# Altium PCB PCB1.PcbDoc
Units mil, origin at the board's own origin, x right, y up, seen from the top; angles counter-clockwise.
Board outline 3543.31 x 4479.86 mil, 2 copper layers (Top Layer, Bottom Layer); 70 components, 150 nets, 536 pads, 21 vias.
Unrouted connection lines stored in the file: 8.
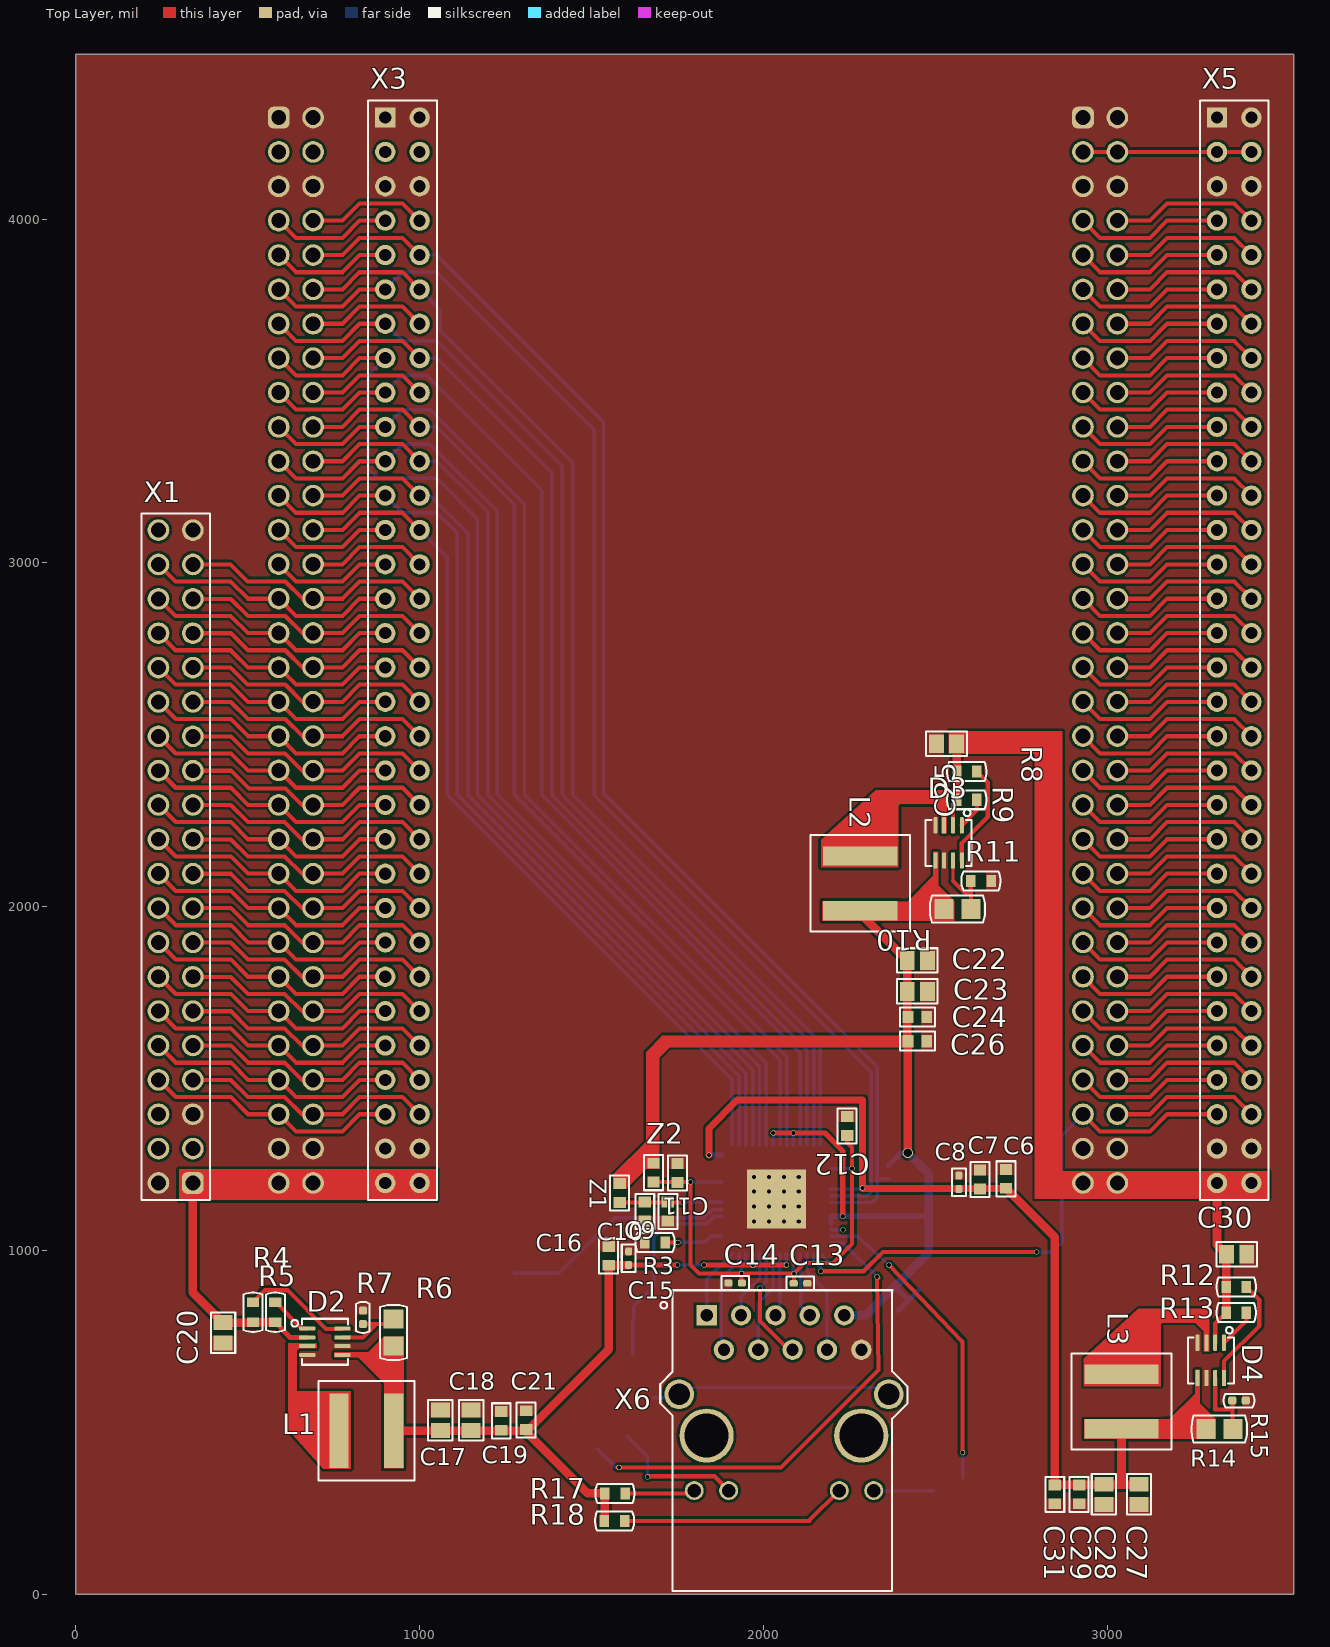
[diagram p0: Top Layer view]
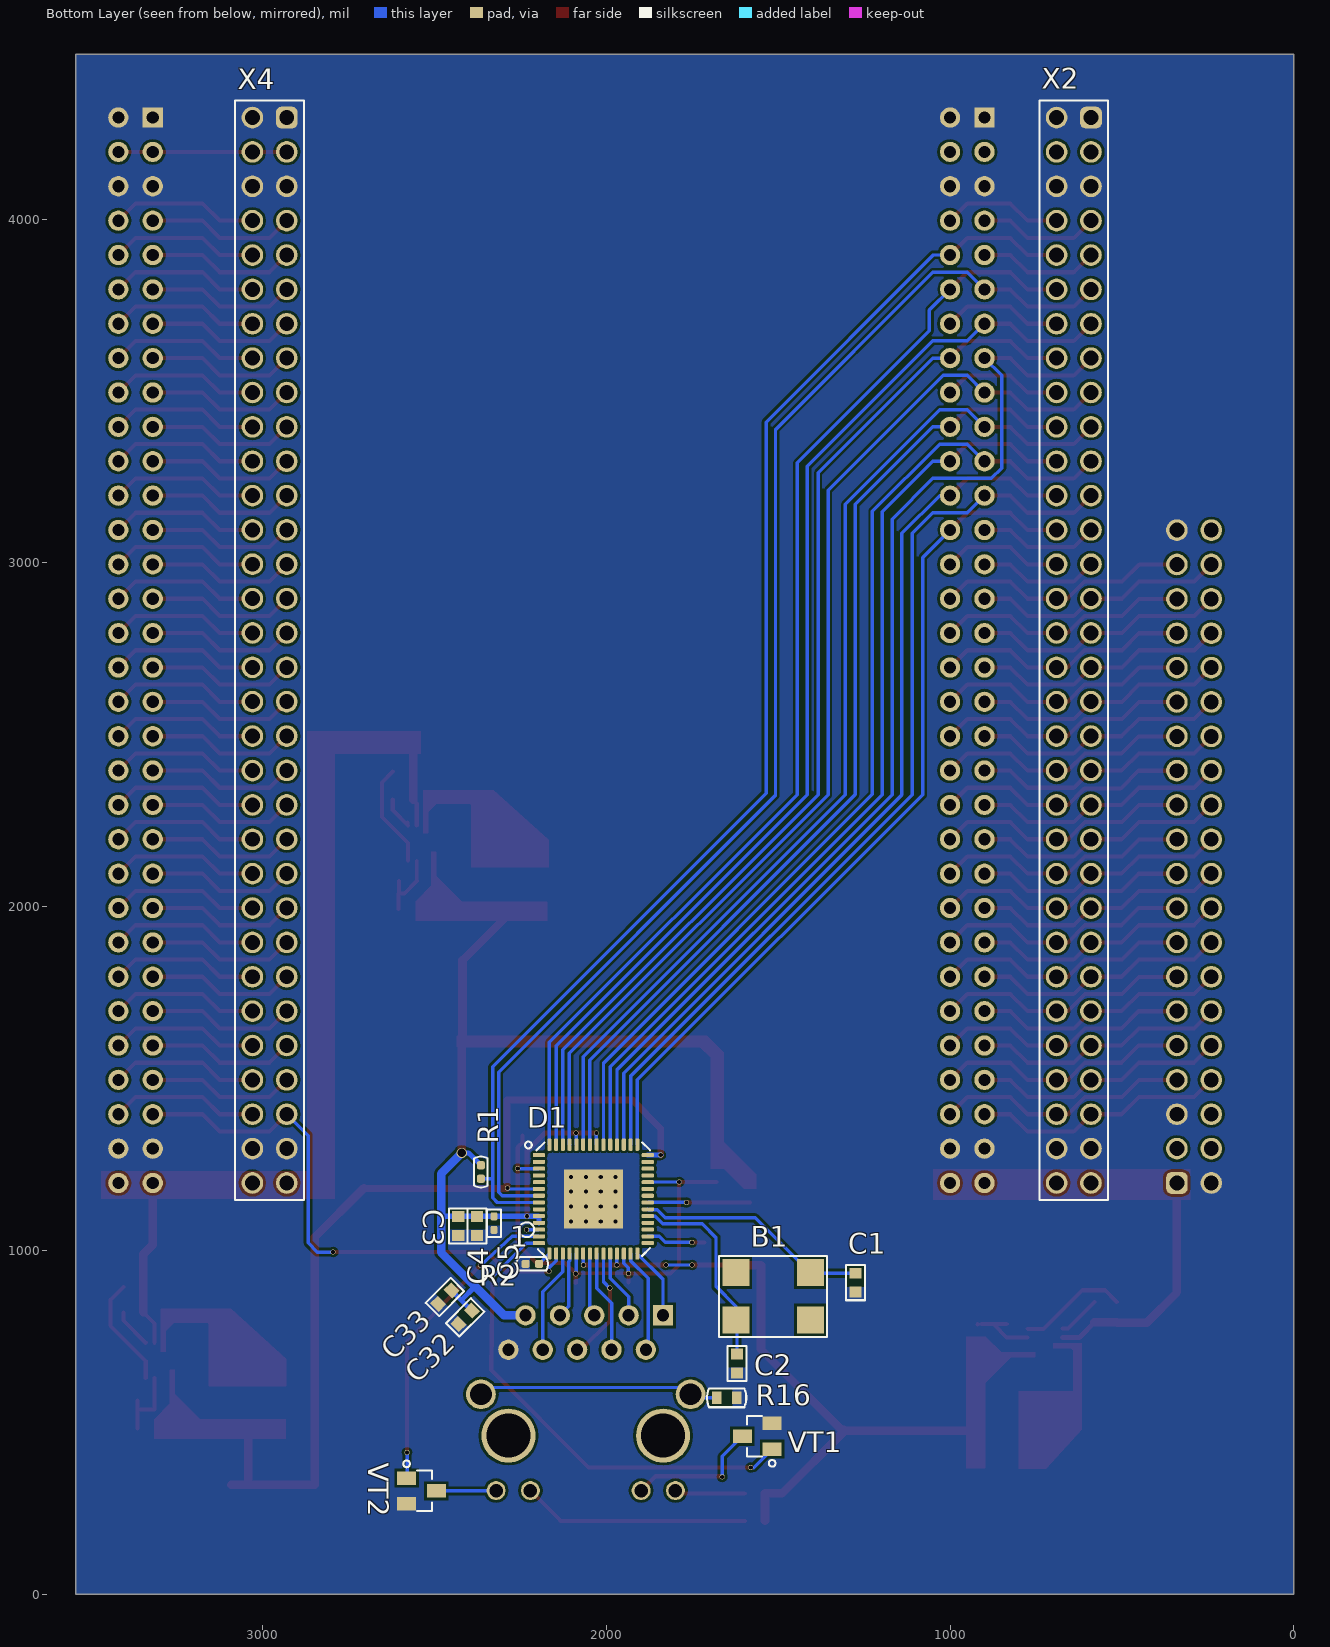
[diagram p1: Bottom Layer view, seen from below]

## Layer stack, top to bottom
Top Solder: solder mask 0.4, Solder Resist, Dk 3.5
Top Layer: signal copper 1.4
Dielectric 1: dielectric 12.6, FR-4, Dk 4.8
Bottom Layer: signal copper 1.4
Bottom Solder: solder mask 0.4, Solder Resist, Dk 3.5

## Board outline
0,0 3543.31,0 3543.31,4479.86 0,4479.86

## Design rules (kind name [scope] priority, off if disabled: settings)
Clearance [All] p1: gap=7.5 ignorepadtopadclearanceinfootprint=FALSE
PlaneConnect [All] p1: planeconnectstyle=Direct reliefexpansion=20 reliefentries=4 reliefconductorwidth=10 reliefairgap=10
PolygonConnect [All] p1: connectstyle=Direct reliefconductorwidth=10 reliefentries=4 polygonreliefangle="90 Angle" airgapwidth=10
RoutingVias [All] p1: holewidth=27 width=30 viastyle="Through Hole" minholewidth=27 minwidth=30 maxholewidth=27 maxwidth=30
SolderMaskExpansion [All] p1: expansion=4
Width [All] p1: maxlimit=10 minlimit=15 preferedwidth=10 toplayer_minwidth=25 minimp=50.000000 maximp=50.000000 favimp=50.000000
29 further rules are at their usual default settings.

## Components (designator, comment, footprint, x,y, rotation, side; value= is the part's Value field where it differs from the comment)
1 "TP_1" TP0.3 2232,1060 r90 bottom
B1 "РК540-5ДП-25000К-П18" DFN580P700X120-4N 1515,866 r180 bottom
C1 "18" CAPC1608L 1275,906 r90 bottom
C2 "18" CAPC1608L 1620,671 r90 bottom
C3 "4,7 мк" CAPC1608L 2431,1071 r90 bottom
C4 "1 мк" CAPC1608L 2376,1071 r270 bottom
C5 "0,1 мк" CAPC1005L 2327,1079 r270 bottom
C6 "4,7 мк" CAPC1608L 2706,1208 r270 top
C7 "1 мк" CAPC1608L 2630,1206 r90 top
C8 "0,1 мк" CAPC1005L 2569,1198 r90 top
C9 "10 мк" CAPC1608L 1722,1113 r90 top
C10 "4,7 мк" CAPC1608L 1655,1113 r90 top
C11 "4,7 мк" CAPC1608L 1750,1225 r270 top
C12 "1 мк" CAPC1608L 2244,1362 r90 top
C13 "0,1 мк" CAPC1005L 2108,904 r0 top
C14 "0,1 мк" CAPC1005L 1918,905 r180 top
C15 "1 мк" CAPC1608L 1550,984 r90 top
C16 "0,1 мк" CAPC1005L 1608,977 r90 top
C17 "22 мк" CAPC2012L 1060,505.47 r90 top
C18 "22 мк" CAPC2012L 1150,505.47 r90 top
C19 "0,1 мк" CAPC1608L 1237.43,503.94 r90 top
C20 "22 мк" CAPC2012L 428,760 r90 top
C21 "0,1 мк" CAPC1608L 1310,505.94 r90 top
C22 "22 мк" CAPC2012L 2448.13,1843.53 r0 top
C23 "22 мк" CAPC2012L 2448.13,1753.53 r0 top
C24 "0,1 мк" CAPC1608L 2448.13,1678.53 r0 top
C25 "22 мк" CAPC2012L 2533,2474 r0 top
C26 "0,1 мк" CAPC1608L 2448.13,1608.53 r0 top
C27 "22 мк" CAPC2012L 3093,290 r270 top
C28 "22 мк" CAPC2012L 2991,290 r270 top
C29 "0,1 мк" CAPC1608L 2919,290 r270 top
C30 "22 мк" CAPC2012L 3377,988.54 r180 top
C31 "0,1 мк" CAPC1608L 2848,290 r270 top
C32 "0,1 мк" CAPC1608L 2411,805 r315 bottom
C33 "1000" CAPC1608L 2470,864 r315 bottom
D1 "88E1512-A0-NNP2I000*" QFN50P800X800X100_HS-57N 2038,1149 r180 bottom
D2 "MP2143" MP2143 724,734 r270 top
D3 "MP2143" MP2143 2539,2185.53 r180 top
D4 "MP2143" MP2143 3302,680 r180 top
L1 "1 мк" INDC6466X32N 845,475 r0 top
L2 "1 мк" INDC6466X32N 2282,2068 r270 top
L3 "1 мк" INDC6466X32N 3042,560 r270 top
R1 "4,7 к" RESC1005L 2365,1228 r270 bottom
R2 "0" RESC1005L 2215.35,960.51 r180 bottom
R3 "4,99 к" RESC1608L 1685,1023 r180 top
R4 "100 к" RESC1608L 515,820 r270 top
R5 "100 к" RESC1608L 580,820 r270 top
R6 "200 к" RESC2012X90 924,761 r270 top
R7 "44,2 к" RESC1005L 835,805 r270 top
R8 "100 к" RESC1608L 2592,2393 r180 top
R9 "100 к" RESC1608L 2592,2311 r180 top
R10 "200 к" RESC2012X90 2565,1993 r180 top
R11 "100 к" RESC1608L 2633,2075 r180 top
R12 "100 к" RESC1608L 3376,893.54 r180 top
R13 "100 к" RESC1608L 3376,818.54 r180 top
R14 "200 к" RESC2012X90 3327,480 r180 top
R15 "300 к" RESC1005L 3384,563 r180 top
R16 "0" RESC1608L 1650,571 r180 bottom
R17 "750" RESC1608L 1568,292.7 r180 top
R18 "750" RESC1608L 1567,212.7 r180 top
VT1 "NDS331N" SOT95P251X112-3N 1561,459 r0 bottom
VT2 "NDS331N" SOT95P251X112-3N 2538,300 r180 bottom
X1 "PLD40" PLD-40 290,1746 r90 top
X2 "PLD64" PLD-64chin 640,3746 r270 bottom
X3 "pbd-64" PBD-64chain 950,4046 r0 top
X4 "PLD64" PLD-64chin 2980,3746 r270 bottom
X5 "pbd-64" PBD-64chain 3370,4046 r0 top
X6 "HFJ11-1G01E-L12RL" HALO_HFJ11-1G01E 2060,556 r0 top
Z1 "BLM18PG471SN1" INDC1608L 1582,1167 r270 top
Z2 "BLM18PG471SN1" INDC1608L 1680,1226 r270 top

## Footprints (in the part's own frame and the unit in brackets; to place one, negate y for a bottom-side part, rotate by r counter-clockwise, add the part's x,y. Pads: shape width x height; smd on the part's side, far side on the other; paste and mask are expansions set on the pad)
CAPC1005L [mm] "Chip Capacitor, Body 1.0x0.5mm, IPC High Density"
  rrect50% 0.6x0.5 smd: 1(-0.5,0) 2(0.5,0)
  Top Layer pour cut-out: -0.2,0.5 -0.2,-0.5 0.2,-0.5 0.2,0.5
  silkscreen extent -1.02,-0.51 1.02,0.51, body extent -0.55,-0.3 0.55,0.3, height 0.6
CAPC1608L [mm] "Chip Capacitor, Body 1.6x0.8mm, IPC High Density"
  rect 0.8x0.9 smd: 1(-0.7,0) 2(0.7,0)
  Top Layer pour cut-out: -0.3,0.7 -0.3,-0.7 0.3,-0.7 0.3,0.7
  silkscreen extent -1.3,-0.7 1.3,0.7, body extent -0.87,-0.48 0.87,0.48, height 0.85
CAPC2012L [mm] "Chip Capacitor, Body 2.0x1.3mm, IPC High Density"
  rect 1.1x1.4 smd: 1(-0.75,0) 2(0.75,0)
  Top Layer pour cut-out: -0.2,0.9 -0.2,-0.9 0.2,-0.9 0.2,0.9
  silkscreen extent -1.5,-0.9 1.5,0.9, body extent -1.1,-0.72 1.1,0.73, height 1.1
DFN580P700X120-4N [mm] "DFN, 4-Leads, Body 5,00x7,00mm, Pitch 5,80mm, IPC Medium Density"
  rect 2x2 smd paste-0.1: 1(-2.75,-1.75) 2(2.75,-1.75) 3(2.75,1.75) 4(-2.75,1.75)
  silkscreen extent -4,-3 4,3, body extent -3.5,-2.5 3.5,2.5, height 1.21
HALO_HFJ11-1G01E [mm] "1x1 Tab-Down Gigabit Short Body RJ45"
  rect 1.5x1.5 hole 0.9: 1(-5.71,6.475)
  round 1.5 hole 0.9: 2(-4.44,3.935) 3(-3.17,6.475) 4(-1.9,3.935) 5(-0.63,6.475) 6(0.64,3.935) 7(1.91,6.475) 8(3.18,3.935) 9(4.45,6.475) 10(5.72,3.935)
  round 1.4 hole 1: 11(-6.63,-6.475) 12(-4.09,-6.475) 13(4.09,-6.475) 14(6.63,-6.475)
  round 2.2 hole 1.6: 15(7.745,0.635) 16(-7.745,0.635)
  round 4 hole 3.25: 17(5.715,-2.415) 18(-5.715,-2.415)
  silkscreen extent -9.14,-13.91 9.14,8.33, body extent -9.5,-13.84 9.5,8.25, height 14.97
INDC1608L [mm] "Chip Inductor, Body 1.6x0.8mm, IPC High Density"
  rect 0.8x0.9 smd: 1(-0.7,0) 2(0.7,0)
  Top Layer pour cut-out: -0.3,0.7 -0.3,-0.7 0.3,-0.7 0.3,0.7
  silkscreen extent -1.3,-0.7 1.3,0.7, body extent -0.88,-0.48 0.87,0.48, height 0.71
INDC6466X32N [mm] "Chip Inductor, 2-Leads, Body 6,36x6,56mm, IPC Medium Density"
  rect 1.43x5.5 smd paste-0.1: 1(-2.02,0) 2(2.02,0)
  silkscreen extent -3.56,-3.68 3.56,3.68, body extent -3.18,-3.28 3.18,3.28, height 3.21
MP2143 [mm]
  rrect50% 0.3x1.2 smd mask+0.04: 1(-0.975,-1.3) 2(-0.325,-1.3) 3(0.325,-1.3) 4(0.975,-1.3) 5(0.975,1.3) 6(0.325,1.3) 7(-0.325,1.3) 8(-0.975,1.3)
  silkscreen extent -1.7,-2.48 1.7,1.7, body extent -1.5,-1.52 1.5,1.52, height 0.81
PBD-64chain [mm] "Штырьевой соединитель шаг 2.54mm , 64 в 2 ряда"
  rect 1.5x1.5 hole 0.9: 1(-1.27,6.35)
  round 1.5 hole 0.9: 2(1.27,6.35) 3(-1.27,3.81) 4(1.27,3.81) 5(-1.27,1.27) 6(1.27,1.27) 7(-1.27,-1.27) 8(1.27,-1.27) 9(-1.27,-3.81) 10(1.27,-3.81) 11(-1.27,-6.35) 12(1.27,-6.35) 13(-1.27,-8.89) 14(1.27,-8.89) 15(-1.27,-11.43) 16(1.27,-11.43) 17(-1.27,-13.97) 18(1.27,-13.97) 19(-1.27,-16.51) 20(1.27,-16.51) 21(-1.27,-19.05) 22(1.27,-19.05) 23(-1.27,-21.59) 24(1.27,-21.59) 25(-1.27,-24.13) 26(1.27,-24.13) 27(-1.27,-26.67) 28(1.27,-26.67) 29(-1.27,-29.21) 30(1.27,-29.21) 31(-1.27,-31.75) 32(1.27,-31.75) 33(-1.27,-34.29) 34(1.27,-34.29) 35(-1.27,-36.83) 36(1.27,-36.83) 37(-1.27,-39.37) 38(1.27,-39.37) 39(-1.27,-41.91) 40(1.27,-41.91) 41(-1.27,-44.45) 42(1.27,-44.45) 43(-1.27,-46.99) 44(1.27,-46.99) 45(-1.27,-49.53) 46(1.27,-49.53) 47(-1.27,-52.07) 48(1.27,-52.07) 49(-1.27,-54.61) 50(1.27,-54.61) 51(-1.27,-57.15) 52(1.27,-57.15) 53(-1.27,-59.69) 54(1.27,-59.69) 55(-1.27,-62.23) 56(1.27,-62.23) 57(-1.27,-64.77) 58(1.27,-64.77) 59(-1.27,-67.31) 60(1.27,-67.31) 61(-1.27,-69.85) 62(1.27,-69.85) 63(-1.27,-72.39) 64(1.27,-72.39)
  silkscreen extent -2.54,-73.66 2.54,7.62, body extent -2.54,-73.66 2.54,7.62, height 8.51
PLD-40 [mm]
  rrect50% 1.6x1.6 hole 1.1: 1(-13.97,-1.27)
  round 1.6 hole 1.1: 2(-13.97,1.27) 3(-11.43,-1.27) 4(-11.43,1.27) 5(-8.89,-1.27) 6(-8.89,1.27) 7(-6.35,-1.27) 8(-6.35,1.27) 9(-3.81,-1.27) 10(-3.81,1.27) 11(-1.27,-1.27) 12(-1.27,1.27) 13(1.27,-1.27) 14(1.27,1.27) 15(3.81,-1.27) 16(3.81,1.27) 17(6.35,-1.27) 18(6.35,1.27) 19(8.89,-1.27) 20(8.89,1.27) 21(11.43,-1.27) 22(11.43,1.27) 23(13.97,-1.27) 24(13.97,1.27) 25(16.5,-1.27) 26(16.5,1.27) 27(19.04,-1.27) 28(19.04,1.27) 29(21.58,-1.27) 30(21.58,1.27) 31(24.12,-1.27) 32(24.12,1.27) 33(26.66,-1.27) 34(26.66,1.27) 35(29.2,-1.27) 36(29.2,1.27) 37(31.74,-1.27) 38(31.74,1.27) 39(34.28,-1.27) 40(34.28,1.27)
  silkscreen extent -15.24,-2.54 35.5,2.54, body extent -15.24,-2.56 35.52,2.54, height 8.5
PLD-64chin [mm]
  rrect50% 1.6x1.6 hole 1.1: 1(-13.97,1.27)
  round 1.6 hole 1.1: 2(-13.97,-1.27) 3(-11.43,1.27) 4(-11.43,-1.27) 5(-8.89,1.27) 6(-8.89,-1.27) 7(-6.35,1.27) 8(-6.35,-1.27) 9(-3.81,1.27) 10(-3.81,-1.27) 11(-1.27,1.27) 12(-1.27,-1.27) 13(1.27,1.27) 14(1.27,-1.27) 15(3.81,1.27) 16(3.81,-1.27) 17(6.35,1.27) 18(6.35,-1.27) 19(8.89,1.27) 20(8.89,-1.27) 21(11.43,1.27) 22(11.43,-1.27) 23(13.97,1.27) 24(13.97,-1.27) 25(16.5,1.27) 26(16.5,-1.27) 27(19.04,1.27) 28(19.04,-1.27) 29(21.58,1.27) 30(21.58,-1.27) 31(24.12,1.27) 32(24.12,-1.27) 33(26.66,1.27) 34(26.66,-1.27) 35(29.2,1.27) 36(29.2,-1.27) 37(31.74,1.27) 38(31.74,-1.27) 39(34.28,1.27) 40(34.29,-1.27) 41(36.83,1.27) 42(36.83,-1.27) 43(39.37,1.27) 44(39.37,-1.27) 45(41.91,1.27) 46(41.91,-1.27) 47(44.45,1.27) 48(44.45,-1.27) 49(46.99,1.27) 50(46.99,-1.27) 51(49.53,1.27) 52(49.53,-1.27) 53(52.07,1.27) 54(52.07,-1.27) 55(54.61,1.27) 56(54.61,-1.27) 57(57.15,1.27) 58(57.15,-1.27) 59(59.69,1.27) 60(59.69,-1.27) 61(62.23,1.27) 62(62.23,-1.27) 63(64.77,1.27) 64(64.77,-1.27)
  silkscreen extent -15.24,-2.54 66.04,2.54, body extent -15.24,-2.56 66.04,2.54, height 8.5
QFN50P800X800X100_HS-57N [mm] "QFN, 56-Leads, Body 8,00x8,00mm, Pitch 0,50mm, Thermal Pad 4,37x4,37mm, IPC Medium Density"
  rrect50% 0.9x0.3 smd mask+0.04: 1(-4.025,3.25) 2(-4.025,2.75) 3(-4.025,2.25) 4(-4.025,1.75) 5(-4.025,1.25) 6(-4.025,0.75) 7(-4.025,0.25) 8(-4.025,-0.25) 9(-4.025,-0.75) 10(-4.025,-1.25) 11(-4.025,-1.75) 12(-4.025,-2.25) 13(-4.025,-2.75) 14(-4.025,-3.25) 29(4.025,-3.25) 30(4.025,-2.75) 31(4.025,-2.25) 32(4.025,-1.75) 33(4.025,-1.25) 34(4.025,-0.75) 35(4.025,-0.25) 36(4.025,0.25) 37(4.025,0.75) 38(4.025,1.25) 39(4.025,1.75) 40(4.025,2.25) 41(4.025,2.75) 42(4.025,3.25)
  rrect50% 0.3x0.9 smd mask+0.04: 15(-3.25,-4.025) 16(-2.75,-4.025) 17(-2.25,-4.025) 18(-1.75,-4.025) 19(-1.25,-4.025) 20(-0.75,-4.025) 21(-0.25,-4.025) 22(0.25,-4.025) 23(0.75,-4.025) 24(1.25,-4.025) 25(1.75,-4.025) 26(2.25,-4.025) 27(2.75,-4.025) 28(3.25,-4.025) 43(3.25,4.025) 44(2.75,4.025) 45(2.25,4.025) 46(1.75,4.025) 47(1.25,4.025) 48(0.75,4.025) 49(0.25,4.025) 50(-0.25,4.025) 51(-0.75,4.025) 52(-1.25,4.025) 53(-1.75,4.025) 54(-2.25,4.025) 55(-2.75,4.025) 56(-3.25,4.025)
  rect 4.37x4.37 hole 0.3 copper offset 0.55,0.55 mask+0.05: EPAD(-0.55,-0.55)
  silkscreen extent -5.05,-4.2 4.2,4.25, body extent -4,-4 4,4, height 1
RESC1005L [mm] "Chip Resistor, Body 1.1x0.5mm, IPC High Density"
  rrect50% 0.6x0.6 smd: 1(-0.5,0) 2(0.5,0)
  Top Layer pour cut-out: -0.2,0.5 -0.2,-0.5 0.2,-0.5 0.2,0.5
  silkscreen extent -1.15,-0.5 1.15,0.5, body extent -0.55,-0.3 0.55,0.3, height 0.4
RESC1608L [mm] "Chip Resistor, Body 1.6x0.8mm, IPC High Density"
  rect 0.7x0.9 smd: 1(-0.75,0) 2(0.75,0)
  Top Layer pour cut-out: -0.4,0.7 -0.4,-0.7 0.4,-0.7 0.4,0.7
  silkscreen extent -1.45,-0.7 1.45,0.7, body extent -0.85,-0.48 0.85,0.48, height 0.6
RESC2012X90 [mm] "Chip Resistor, Body 2.0x1.25mm, IPC Low Density"
  rect 1.4x1.5 smd: 1(-1,0) 2(1,0)
  Top Layer pour cut-out: -0.3,1 -0.3,-1 0.3,-1 0.3,1
  silkscreen extent -2.05,-1 2.05,1, body extent -1.08,-0.7 1.07,0.7, height 0.9
SOT95P251X112-3N [mm] "SOT23, 3-Leads, Body 2,92x2,51mm, Pitch 0,95mm, IPC Medium Density"
  rect 1.4x1 smd: 1(-1.1,0.95) 2(-1.1,-0.95) 3(1.1,0)
  silkscreen extent -1.35,-1.5 0.76,2.25, body extent -1.35,-1.52 1.36,1.52, height 1.12
TP0.3 [mil] "Test point 0.3x0.7"
  round 15 hole 12 paste+0: 1(0,0)
  silkscreen extent -22,-22 22,22

## Part data
1: "Test point"
B1: "SMD кварцевый резонатор", Manufacturer="Завод «Метеор»", Package="5,0?3,2?1,05 мм", ManufacturerPartNumber=РК540-5ДП-25000К-П18, SymAuthor="Ерешко П.А.", TU/GOST=КЖДГ.433513.018ТУ, Type="Резонатор кварцевый"
C1 C2: library part i6124B5A087073000028, "Чип-конденсатор", ManufacturerPartNumber="ATC600S180GT250*T (0603 NP0 18 пФ ±2 % 250 В)", Power/Voltage="250 В", Tolerance="±2 %", ImKey=i6124B5A087073000028, Name=0603, PCADLibrary=PASSIV.LIB, PCADPattern=C0603, PCADSymbol=C, PCADType=C0603, TKE/TKC={TKE/TKC}, Type=Конденсатор
C3 C6 C10 C11: library part i6124B5A08768E000004, "Чип-конденсатор", ManufacturerPartNumber="GRM188R61E475KE11* Murata", Power/Voltage="25 В", Tolerance="±10 %", ImKey=i6124B5A08768E000004, Name=0603, PCADLibrary=PASSIV.LIB, PCADPattern=C0603, PCADSymbol=C, PCADType=C0603, TKE/TKC=X5R, Type=Конденсатор
C4 C7 C12 C15: library part i6124B5A08768700000A, "Чип-конденсатор", ManufacturerPartNumber="GCM188R71E105KA64* Murata", Power/Voltage="25 В", Tolerance="±10 %", ImKey=i6124B5A08768700000A, Name=0603, PCADLibrary=PASSIV.LIB, PCADPattern=C0603, PCADSymbol=C, PCADType=C0603, TKE/TKC=X7R, Type=Конденсатор
C5 C8 C13 C14 C16: library part i6124B5A087684000003, "Чип-конденсатор", ManufacturerPartNumber="GRM155R71H104KE14* Murata", Power/Voltage="50 В", Tolerance="±10 %", ImKey=i6124B5A087684000003, Name=0402, PCADLibrary=PASSIV.LIB, PCADPattern=C0402, PCADSymbol=C, PCADType=C0402, TKE/TKC=X7R, Type=Конденсатор
C9: library part i6124B5A08768E000003, "Чип-конденсатор", ManufacturerPartNumber="GRM188R61E106MA73* Murata", Power/Voltage="25 В", Tolerance="±20 %", ImKey=i6124B5A08768E000003, Name=0603, PCADLibrary=PASSIV.LIB, PCADPattern=C0603, PCADSymbol=C, PCADType=C0603, TKE/TKC=X5R, Type=Конденсатор
C17 C18 C20 C22 C23 C25 C27 C28 C30: library part i6124B5A08704300000C, "Чип-конденсатор", ManufacturerPartNumber="0805 X5R 22 мкФ ±10 % 16 В", Power/Voltage="16 В", Tolerance="±10 %", ImKey=i6124B5A08704300000C, Name=0805, PCADLibrary=PASSIV.LIB, PCADPattern=C0805, PCADSymbol=C, PCADType=C0805, TKE/TKC={TKE/TKC}, Type=Конденсатор
C19 C21 C24 C26 C29 C31 C32: library part i6124B5A08701E000001, "Чип-конденсатор", ManufacturerPartNumber="0603 X7R 0,1 мкФ ±10 % 50 В", Power/Voltage="50 В", Tolerance="±10 %", ImKey=i6124B5A08701E000001, Name=0603, PCADLibrary=PASSIV.LIB, PCADPattern=C0603, PCADSymbol=C, PCADType=C0603, TKE/TKC={TKE/TKC}, Type=Конденсатор
C33: library part i6124B5A08701E000003, "Чип-конденсатор", ManufacturerPartNumber="0603 X7R 1000 пФ ±10 % 50 В", Power/Voltage="50 В", Tolerance="±10 %", ImKey=i6124B5A08701E000003, Name=0603, PCADLibrary=PASSIV.LIB, PCADPattern=C0603, PCADSymbol=C, PCADType=C0603, TKE/TKC={TKE/TKC}, Type=Конденсатор
D1: library part 88E1512-A0-NNP2I000, "Gigabit Ethernet Transceiver", Manufacturer=Marvell, Package="56-Pin QFN", ManufacturerPartNumber=88E1512-A0-NNP2I000*, SymAuthor="Семенов В.С.", Type=Микросхема
L1 L2 L3: library part i6124B5A0877B8000001, "Дроссель", Manufacturer=Coilcraft, ManufacturerPartNumber="XEL6030-102ME* Coilcraft", Package=XEL6030-471MEB, Tolerance="±20 %", ImKey=i6124B5A0877B8000001, PCADLibrary=PASSIV.LIB, PCADSymbol=INDUCT, PCADType=XEL6030, SymAuthor="Семенов В.С.", Type=Дроссель
R1: library part i6124B5A0870A6000005, "Чип-резистор", ManufacturerPartNumber="Р1-12-0,062-4,7 кОм ±5 % - Т", Power/Voltage="0,062 Вт", Tolerance="±5 %", ImKey=i6124B5A0870A6000005, Name=0402, TU/GOST="АЛЯР.434110.005 ТУ", Type=Резистор
R2: library part i6124B5A0870A6000019, "Чип-резистор", ManufacturerPartNumber=Р1-8В-0402-0, Power/Voltage="0,062 Вт", Tolerance={Tolerance}, ImKey=i6124B5A0870A6000019, Name=0402, TKE/TKC="±200  X10-6/ °С", TU/GOST="ОЖ0.467.164 ТУ", Type=Резистор
R3: library part i6124B5A08741A000016, "Чип-резистор", ManufacturerPartNumber="Р1-12-0,1-4,99 кОм ±1 % - Т", Power/Voltage="0,1 Вт", Tolerance="±1 %", ImKey=i6124B5A08741A000016, Name=0603, TU/GOST="АЛЯР.434110.005 ТУ", Type=Резистор
R4 R5 R8 R9 R11 R12 R13: library part i6124B5A08707A000017, "Чип-резистор", ManufacturerPartNumber="Р1-12-0,1-100 кОм ±5 % - Т", Power/Voltage="0,1 Вт", Tolerance="±5 %", ImKey=i6124B5A08707A000017, Name=0603, TU/GOST="АЛЯР.434110.005 ТУ", Type=Резистор
R6 R10 R14: library part i6124B5A08A76800003C, "Резистор", ManufacturerPartNumber="Р1-16П-0,062 Вт-200 кОм ±0,5%-0,5-Ж", Power/Voltage="0,062 Вт", Tolerance="±0,5 %", ImKey=i6124B5A08A76800003C, Name=Р1-16П-0,062, TU=АЛЯР.434110.002ТУ, TU/GOST="АЛЯР.434110.002 ТУ", Type=Резистор
R7: library part i6124B5A08765B00000D, "Чип-резистор", ManufacturerPartNumber="Р1-12-0,062-44,2 кОм ±1 % - Т", Power/Voltage="0,062 Вт", Tolerance="±1 %", ImKey=i6124B5A08765B00000D, Name=0402, TU/GOST="АЛЯР.434110.005 ТУ", Type=Резистор
R15: library part i6124B5A0870A6000055, "Чип-резистор", ManufacturerPartNumber="Р1-12-0,062-300 кОм ±5 % - Т", Power/Voltage="0,062 Вт", Tolerance="±5 %", ImKey=i6124B5A0870A6000055, Name=0402, TU/GOST="АЛЯР.434110.005 ТУ", Type=Резистор
R16: library part i6124B5A08707A000077, "Чип-резистор", ManufacturerPartNumber=Р1-8В-0603-0, Power/Voltage="0,1 Вт", Tolerance="±5 %", ImKey=i6124B5A08707A000077, Name=0603, TU/GOST="ОЖ0.467.164 ТУ", Type=Резистор
R17 R18: library part i6124B5A08707A00003B, "Чип-резистор", ManufacturerPartNumber="Р1-12-0,1-750 Ом ±5 % - Т", Power/Voltage="0,1 Вт", Tolerance="±5 %", ImKey=i6124B5A08707A00003B, Name=0603, TU/GOST="АЛЯР.434110.005 ТУ", Type=Резистор
VT1 VT2: "N-Channel Logic Level Field Effect Transistor", Manufacturer="Fairchild Semiconductor", Package=SOT-23, ManufacturerPartNumber=NDS331N, Type=Транзистор
X1 X2 X4: "Штыри на плату, шаг 2.54мм., двухрядные", Type=Вилка
  X1: ManufacturerPartNumber=PLD40
  X2 X4: ManufacturerPartNumber=PLD64
X3 X5: "Гнездо на плату шаг 2.54мм., двухрядные", Manufacturer="Бурый Медведь", ManufacturerPartNumber=pbd-64, Type=Розетка
X6: "Gigabit (10/100/1000) Ethernet RJ45 со светодиодами.", Manufacturer="HALO Electronics", ManufacturerPartNumber=HFJ11-1G01E-L12RL, Type=Розетка
Z1 Z2: library part BLM18P, "Помехоподавляющий фильтр", Manufacturer=Murata, Package=0603, ManufacturerPartNumber=BLM18PG471SN1, Type=Фильтр
D2 D3 D4: ManufacturerPartNumber=MP2143, Type=Микросхема

## Free pads (board coordinates)
  round 15 hole 12 paste+0: 2(1580,368.18) 2(1663,341) 2(1751,1023) 2(1767,1139) 2(1788,1199) 2(1842,1277) 2(1936,933) 2(1970,957) 2(1990,890) 2(2067,957) 2(2089,932) 2(2167,939) 2(2231,1099.03) 2(2258,1238) 2(2288,1181) 2(2331,923) 2(2366,957) 2(2580,412)

## Via types
v1: diameter 27.56, hole 11.81, Top Layer to Bottom Layer, 15 vias
v2: diameter 15, hole 12, Top Layer to Bottom Layer, 5 vias
v3: diameter 30, hole 25, Top Layer to Bottom Layer, 1 vias

## Nets (pads, with @x,y where several pads share a name; then routed paths per layer and width w, separated by ;. In a path a pad name is that pad's centre, name@x,y a point inside that pad or via, vN(x,y) a via of type N, cw(c..) or ccw(c..) an arc to the next point about the centre after c; other vN are vias at no path point)
13_AA25: X4.51 X5.51 | length 431.4
  Top Layer w12: X4.51 2980,1746 3125,1746 3175,1796 X5.51
13_AB24: X4.56 X5.56 | length 431.4
  Top Layer w12: X4.56 3125,1596 3175,1646 3370,1646 X5.56
13_AB26: X4.60 X5.60 | length 431.4
  Top Layer w12: X4.60 3125,1396 3175,1446 3370,1446 X5.60
13_AC24: X4.55 X5.55 | length 431.4
  Top Layer w12: X4.55 2980,1546 3125,1546 3175,1596 X5.55
13_AC26: D1.16 pad.2@2167,939 X4.59 X5.59 | length 1626.5
  Top Layer w12: pad.2@2167,939 2292,939.15 2347.85,995 v2(2795,995) ; X4.59 2980,1346 3125,1346 3175,1396 X5.59
  Bottom Layer w10: D1.16 2146.27,969.73 2167,949 pad.2@2167,939 ; v2(2795,995) 2841,995 2868,1022 2868,1334 X4.59
13_U21: X4.46 X5.46 | length 431.4
  Top Layer w12: X4.46 3125,2096 3175,2146 3370,2146 X5.46
13_V21: X4.45 X5.45 | length 431.4
  Top Layer w12: X4.45 2980,2046 3125,2046 3175,2096 X5.45
13_V23: X4.48 X5.48 | length 431.4
  Top Layer w12: X4.48 3125,1996 3175,2046 3370,2046 X5.48
13_W21: X4.54 X5.54 | length 431.4
  Top Layer w12: X4.54 3125,1696 3175,1746 3370,1746 X5.54
13_W23: X4.47 X5.47 | length 431.4
  Top Layer w12: X4.47 2980,1946 3125,1946 3175,1996 X5.47
13_W25: X4.58 X5.58 | length 431.4
  Top Layer w12: X4.58 3125,1496 3175,1546 3370,1546 X5.58
13_Y21: X4.53 X5.53 | length 431.4
  Top Layer w12: X4.53 2980,1646 3125,1646 3175,1696 X5.53
13_Y22: X4.50 X5.50 | length 431.4
  Top Layer w12: X4.50 3125,1896 3175,1946 3370,1946 X5.50
13_Y23: X4.49 X5.49 | length 431.4
  Top Layer w12: X4.49 2980,1846 3125,1846 3175,1896 X5.49
13_Y25: X4.52 X5.52 | length 431.4
  Top Layer w12: X4.52 3125,1796 3175,1846 3370,1846 X5.52
13_Y26: X4.57 X5.57 | length 431.4
  Top Layer w12: X4.57 2980,1446 3125,1446 3175,1496 X5.57
14_K25: X4.26 X5.26 | length 431.4
  Top Layer w12: X4.26@3030,3096 3125,3096 3175,3146 3370,3146 X5.26
14_K26: X4.25 X5.25 | length 431.4
  Top Layer w12: X4.25@2930,3096 2980,3046 3125,3046 3175,3096 X5.25
14_L22: X4.32 X5.32 | length 431.4
  Top Layer w12: X4.32@3030,2796 3125,2796 3175,2846 3370,2846 X5.32
14_L23: X4.31 X5.31 | length 431.4
  Top Layer w12: X4.31@2930,2796 2980,2746 3125,2746 3175,2796 X5.31
14_M24: X4.36 X5.36 | length 431.4
  Top Layer w12: X4.36@3030,2596 3125,2596 3175,2646 3370,2646 X5.36
14_M25: X4.35 X5.35 | length 431.4
  Top Layer w12: X4.35@2930,2596 2980,2546 3125,2546 3175,2596 X5.35
14_M26: X4.29 X5.29 | length 431.4
  Top Layer w12: X4.29@2930,2896 2980,2846 3125,2846 3175,2896 X5.29
14_N21: X4.38 X5.38 | length 431.4
  Top Layer w12: X4.38@3030,2496 3125,2496 3175,2546 3370,2546 X5.38
14_N22: X4.37 X5.37 | length 431.4
  Top Layer w12: X4.37@2930,2496 2980,2446 3125,2446 3175,2496 X5.37
14_N26: X4.30 X5.30 | length 431.4
  Top Layer w12: X4.30@3030,2896 3125,2896 3175,2946 3370,2946 X5.30
14_P23: X4.40 X5.40 | length 431.4
  Top Layer w12: X4.40 3125,2396 3175,2446 3370,2446 X5.40
14_P24: X4.39 X5.39 | length 431.4
  Top Layer w12: X4.39@2930,2396 2980,2346 3125,2346 3175,2396 X5.39
14_P25: X4.41 X5.41 | length 431.4
  Top Layer w12: X4.41 2980,2246 3125,2246 3175,2296 X5.41
14_P26: X4.33 X5.33 | length 431.4
  Top Layer w12: X4.33@2930,2696 2980,2646 3125,2646 3175,2696 X5.33
14_R25: X4.42 X5.42 | length 431.4
  Top Layer w12: X4.42 3125,2296 3175,2346 3370,2346 X5.42
14_R26: X4.34 X5.34 | length 431.4
  Top Layer w12: X4.34@3030,2696 3125,2696 3175,2746 3370,2746 X5.34
14_T24: X4.44 X5.44 | length 431.4
  Top Layer w12: X4.44 3125,2196 3175,2246 3370,2246 X5.44
14_T25: X4.43 X5.43 | length 431.4
  Top Layer w12: X4.43 2980,2146 3125,2146 3175,2196 X5.43
15_D25: X4.9 X5.9 | length 431.4
  Top Layer w12: X4.9 2980,3846 3125,3846 3175,3896 X5.9
15_D26: X4.7 X5.7 | length 431.4
  Top Layer w12: X4.7 2980,3946 3125,3946 3175,3996 X5.7
15_E23: X4.13 X5.13 | length 431.4
  Top Layer w12: X4.13 2980,3646 3125,3646 3175,3696 X5.13
15_E25: X4.10 X5.10 | length 431.4
  Top Layer w12: X4.10 3125,3896 3175,3946 3370,3946 X5.10
15_E26: X4.8 X5.8 | length 431.4
  Top Layer w12: X4.8 3125,3996 3175,4046 3370,4046 X5.8
15_F22: X4.15 X5.15 | length 431.4
  Top Layer w12: X4.15 2980,3546 3125,3546 3175,3596 X5.15
15_F23: X4.14 X5.14 | length 431.4
  Top Layer w12: X4.14 3125,3696 3175,3746 3370,3746 X5.14
15_G20: X4.20 X5.20 | length 431.4
  Top Layer w12: X4.20 3125,3396 3175,3446 3370,3446 X5.20
15_G21: X4.19 X5.19 | length 431.4
  Top Layer w12: X4.19 2980,3346 3125,3346 3175,3396 X5.19
15_G22: X4.16 X5.16 | length 431.4
  Top Layer w12: X4.16 3125,3596 3175,3646 3370,3646 X5.16
15_G26: X4.11 X5.11 | length 431.4
  Top Layer w12: X4.11 2980,3746 3125,3746 3175,3796 X5.11
15_H21: X4.22 X5.22 | length 431.4
  Top Layer w12: X4.22 3125,3296 3175,3346 3370,3346 X5.22
15_H22: X4.21 X5.21 | length 431.4
  Top Layer w12: X4.21 2980,3246 3125,3246 3175,3296 X5.21
15_H26: X4.12 X5.12 | length 431.4
  Top Layer w12: X4.12 3125,3796 3175,3846 3370,3846 X5.12
15_J21: X4.23 X5.23 | length 431.4
  Top Layer w12: X4.23 2980,3146 3125,3146 3175,3196 X5.23
15_J25: X4.18 X5.18 | length 431.4
  Top Layer w12: X4.18 3125,3496 3175,3546 3370,3546 X5.18
15_J26: X4.17 X5.17 | length 431.4
  Top Layer w12: X4.17 2980,3446 3125,3446 3175,3496 X5.17
15_K21: X4.24 X5.24 | length 431.4
  Top Layer w12: X4.24 3125,3196 3175,3246 3370,3246 X5.24
15_K22: X4.28 X5.28 | length 431.4
  Top Layer w12: X4.28@3030,2996 3125,2996 3175,3046 3370,3046 X5.28
15_K23: X4.27 X5.27 | length 431.4
  Top Layer w12: X4.27@2930,2996 2980,2946 3125,2946 3175,2996 X5.27
+1,0VD: C6.2 C7.1 C8.1 C27.1 C28.1 C29.1 C31.1 D1.6 D1.42 D4.5 L3.2 pad.2@1842,1277 pad.2@2288,1181 R14.2 | length 2688.8
  Top Layer w20: pad.2@1842,1277 1842,1355 1924,1437 2289,1437 2289,1180 C6.2@2706.01,1180
  Top Layer w25: C6.2 2848,1038.44 C31.1 C27.1@3091.03,317.56 ; 3042,319.56 L3.2
  Bottom Layer w10: D1.6@2197.24,1179.31 D1.6 pad.2@2288,1178.53
  Bottom Layer w15: pad.2@1842,1277 D1.42
+1,8VD: C3.2 C4.1 C5.1 C22.1 C23.1 C24.1 C26.1 C32.1 C33.1 D1.10 D1.11 D1.49 D1.52 D3.5 L2.2 pad.2@2231,1099.03 R1.1 R10.2 X6.9 Z1.1 Z2.1 | length 2386.1
  Top Layer w15: v2(2029,1341) v2(2088,1341) 2179,1341 2231,1289 pad.2@2231,1099.03
  Top Layer w25: L2.2 2282,1980.13 C22.1 C23.1 C26.1@2418.6,1610.5 ; v3(2420.57,1283.43) C26.1
  Bottom Layer w10: D1.49@2029,1308.31 v2(2029,1341) ; D1.52 2087.21,1340.21 v2(2088,1341)
  Bottom Layer w15: D1.11 D1.10@2196.46,1098.27 ; D1.10@2197.23,1099.03 2231,1099.03 2478.97,1099.03 ; R1.1 2400.75,1283.43 v3(2420.57,1283.43) ; 2382,894.97 2422,854.97 ; C32.1 2422,854.97 ; C33.1 2422,854.97
  Bottom Layer w25: X6.9 2297.92,810.92 2481,994 2481,1223 v3(2420.57,1283.43)
+3,3VD: C15.1 C16.1 C17.1 C18.1 C19.1 C21.1 D1.20 D1.25 D2.5 L1.2 pad.2@1970,957 pad.2@2067,957 R6.2 R17.2 R18.2 | length 1931.9
  Top Layer w15: C16.1 v2(1750.68,957.32) ; v2(1827,957) 1970,957 pad.2@2067,957
  Top Layer w25: L1.2 1306.61,475 1488.91,292.7 R17.2 R18.2@1538.47,213.7 ; C21.1 1316.63,478.39 1550,711.76 C15.1 C16.1@1607.13,956.44
  Bottom Layer w10: v2(1750.68,957.32) 1826.68,957.32 v2(1827,957) ; D1.25@1969.88,989.76 1969.88,957.12 pad.2@1970,957 ; pad.2@2067,957 D1.20@2067,990.01
+3.3V: X2.3 X2.4 X3.3 X3.4 X4.3 X4.4 X5.3 X5.4 | length 490
  Top Layer w12: X4.3 X4.4 X5.3 X5.4
+5V: C20.2 C25.2 C30.2 D2.2 D3.2 D4.2 R4.2 R5.2 R8.2 R9.2 R12.2 R13.2 X1.1 X1.40 X2.63 X2.64 X3.63 X3.64 X4.63 X4.64 X5.63 X5.64 | length 1435.8
  Top Layer w12: D3.2 2551.8,2300.32 R9.2 ; D4.2 3314.8,786.87 R13.2
  Top Layer w15: R5.2 623.68,746.8 D2.2
  Top Layer w25: X1.1 340,877.53 C20.2 515,790.07 R5.2 ; R9.2 R8.2 C25.2@2562.47,2473.94 ; X5.63 3320,1016.02 C30.2 R13.2@3347.47,819.54
A2: D1.7 X2.11 X3.11 | length 3843.4
  Top Layer w12: X2.11 640,3746 775,3746 825,3796 X3.11
  Bottom Layer w10: X3.11 950,3846 1050,3846 1508,3388.01 1508,2324 2313.5,1518.5 2313.5,1169.5 2302.84,1158.84 D1.7
A3: D1.56 X2.12 X3.12 | length 3322.9
  Top Layer w12: X2.12 775,3796 825,3846 950,3846 X3.12
  Bottom Layer w10: X3.12 1060,3736 1060,3676 1445,3291 1445,2326 2165.95,1605.05 D1.56
A4: X2.9 X3.9 | length 351.4
  Top Layer w12: X2.9 640,3846 775,3846 825,3896 X3.9
A5: X2.7 X3.7 | length 351.4
  Top Layer w12: X2.7 640,3946 775,3946 825,3996 X3.7
B1: D1.51 X2.19 X3.19 | length 3070.4
  Top Layer w12: X2.19 640,3346 775,3346 825,3396 X3.19
  Bottom Layer w10: X3.19 950,3446 1030,3446 1305,3171 1305,2326 2067.5,1563.5 D1.51
"B2 VREF": X2.14 X3.14 | length 351.4
  Top Layer w12: X2.14 775,3696 825,3746 950,3746 X3.14
B4: D1.8 R1.2 X2.10 X3.10 | length 3848
  Top Layer w12: X2.10 775,3896 825,3946 950,3946 X3.10
  Bottom Layer w10: X3.10 1049,3896 1535,3410 1535,2330 2331,1534 2331,1153 2317.16,1139.16 D1.8 ; 2331.69,1208.31 R1.2
B5: X2.8 X3.8 | length 351.4
  Top Layer w12: X2.8 775,3996 825,4046 950,4046 X3.8
C1: D1.50 X2.20 X3.20 | length 2904.2
  Top Layer w12: X2.20 775,3396 825,3446 950,3446 X3.20
  Bottom Layer w10: X3.20 1050,3396 1275.34,3170.66 1275.34,2326.34 2049,1552.69 2049,1308.62 D1.50
C2: D1.55 X2.13 X3.13 | length 3314.8
  Top Layer w12: X2.13 640,3646 775,3646 825,3696 X3.13
  Bottom Layer w10: X3.13 950,3646 1050,3646 1415,3281 1415,2326 2146.27,1594.73 D1.55
C4: D1.54 X2.16 X3.16 | length 3135.9
  Top Layer w12: X2.16 775,3596 825,3646 950,3646 X3.16
  Bottom Layer w10: X3.16 1050,3596 1384,3262 1384,2326 2126.58,1583.42 D1.54
D1: D1.48 X2.21 X3.21 | length 2946
  Top Layer w12: X2.21 640,3246 775,3246 825,3296 X3.21
  Bottom Layer w10: X3.21 950,3346 1030,3346 1225.97,3150.03 1225.97,2326.97 2008.47,1544.47 D1.48
D4: D1.46 X2.15 X3.15 | length 3223.8
  Top Layer w12: X2.15 640,3546 775,3546 825,3596 X3.15
  Bottom Layer w10: X3.15 850,3546 850,3276 880,3246 1050,3246 1168.2,3127.8 1168.2,2326 1969.1,1525.1 D1.46
D5: D1.53 X2.17 X3.17 | length 3181.8
  Top Layer w12: X2.17 640,3446 775,3446 825,3496 X3.17
  Bottom Layer w10: X3.17 950,3546 1020,3546 1355,3211 1355,2326 2108,1573 2108,1308.57 D1.53
E1: D1.47 X2.22 X3.22 | length 2778.8
  Top Layer w12: X2.22 775,3296 825,3346 950,3346 X3.22
  Bottom Layer w10: X3.22 1050,3296 1197.57,3148.43 1197.57,2326 1988.79,1534.79 D1.47
E2: D1.44 X2.23 X3.23 | length 2725.1
  Top Layer w12: X2.23 640,3146 775,3146 825,3196 X3.23
  Bottom Layer w10: X3.23 950,3146 1050,3146 1110,3086 1110,2326 1929.73,1506.27 D1.44
E5: X2.18 X3.18 | length 351.4
  Top Layer w12: X2.18 775,3496 825,3546 950,3546 X3.18
F2: D1.45 X2.24 X3.24 | length 2650.8
  Top Layer w12: X2.24 775,3196 825,3246 950,3246 X3.24
  Bottom Layer w10: X3.24 1030,3196 1140,3086 1140,2324.83 1949.42,1515.42 D1.45
F4: X2.25 X3.25 | length 351.4
  Top Layer w12: X2.25@590,3096 640,3046 775,3046 825,3096 X3.25
G1: X2.27 X3.27 | length 351.4
  Top Layer w12: X2.27@590,2996 640,2946 775,2946 825,2996 X3.27
G2: X2.28 X3.28 | length 351.4
  Top Layer w12: X2.28@690,2996 775,2996 825,3046 950,3046 X3.28
G4: D1.43 X2.26 X3.26 | length 2516.9
  Top Layer w12: X2.26@690,3096 775,3096 825,3146 950,3146 X3.26
  Bottom Layer w10: X3.26 1080,3016 1080,2326 1910.05,1495.95 D1.43
"G9 VREF": X1.34 X2.33 X3.33 | length 742.7
  Top Layer w12: X1.34 289.61,2746 450,2746 500,2696 590,2696 640,2646 775,2646 825,2696 X3.33
GND: C1.1 C2.1 C3.1 C4.2 C5.2 C6.1 C7.2 C8.2 C9.1 C10.1 C11.1 C12.2 C13.2 C14.2 C15.2 C16.2 C17.2 C18.2 C19.2 C20.1 C21.2 C22.2 C23.2 C24.2 C25.1 C26.2 C27.2 C28.2 C29.2 C30.1 C31.2 C32.2 C33.2 D1.EPAD D2.4 D2.6 D3.4 D3.6 D4.4 D4.6 R2.1 R3.2 R7.1 R11.1 R15.1 R16.2 VT1.2 VT2.2 X1.2 X1.5 X1.39 X2.1 X2.2 X2.5 X2.6 X2.61 X2.62 X3.1 X3.2 X3.5 X3.6 X3.61 X3.62 X4.1 X4.2 X4.5 X4.6 X4.61 X4.62 X5.1 X5.2 X5.5 X5.6 X5.61 X5.62 X6.10
  other v1: 1973.04,1084.04 2016.35,1084.04 2059.65,1084.04 2102.96,1084.04 1973.04,1127.35 2016.35,1127.35 2102.96,1127.35 1973.04,1170.65 2016.35,1170.65 2059.65,1170.65 2102.96,1170.65 1973.04,1213.96 2016.35,1213.96 2059.65,1213.96 2102.96,1213.96
H1: X1.36 X2.31 X3.31 | length 742.7
  Top Layer w12: X1.36 289.61,2846 450,2846 500,2796 590,2796 640,2746 775,2746 825,2796 X3.31
H2: X1.35 X2.32 X3.32 | length 742.7
  Top Layer w12: X1.35 450.39,2895.61 500,2846 608.89,2846 658.89,2796 775,2796 825,2846 950,2846 X3.32
H4: X1.38 X2.29 X3.29 | length 742.7
  Top Layer w12: X1.38 289.61,2946 450,2946 500,2896 590,2896 640,2846 775,2846 825,2896 X3.29
H9: X1.33 X2.34 X3.34 | length 742.7
  Top Layer w12: X1.33 450.39,2795.61 500,2746 608.89,2746 658.89,2696 775,2696 825,2746 950,2746 X3.34
J1: X1.22 X2.45 X3.45 | length 741.9
  Top Layer w12: X1.22@240.79,2195.61 290.39,2146 450.79,2146 500.79,2096 X2.45 640,2046 775,2046 825,2096 X3.45
J4: X1.37 X2.30 X3.30 | length 711.6
  Top Layer w12: X1.37 449.61,2995.61 499.21,2946 608.89,2946 X2.30@658.89,2896 ; X2.30@690,2896 775,2896 825,2946 950,2946 X3.30
K1: X1.21 X2.46 X3.46 | length 709.1
  Top Layer w12: X1.21@340.79,2195.61 450.39,2195.61 500,2146 607.17,2146 657.17,2096 ; X2.46 775,2096 825,2146 950,2146 X3.46
K5: X1.28 X2.39 X3.39 | length 741.5
  Top Layer w12: X1.28@240.79,2495.61 290.39,2446 450.79,2446 500.79,2396 ; 501.18,2396.39 X2.39 ; X2.39@590,2396 640,2346 775,2346 825,2396 X3.39
L2: X1.32 X2.35 X3.35 | length 742.7
  Top Layer w12: X1.32 289.61,2646 450,2646 500,2596 590,2596 640,2546 775,2546 825,2596 X3.35
L4: X1.26 X2.41 X3.41 | length 741.9
  Top Layer w12: X1.26@240.79,2395.61 290.39,2346 450.79,2346 500.79,2296 X2.41 640,2246 775,2246 825,2296 X3.41
L5: X1.27 X2.40 X3.40 | length 741.9
  Top Layer w12: X1.27@340.79,2495.61 451.18,2495.61 500.79,2446 607.56,2446 657.56,2396 X2.40 775,2396 825,2446 950,2446 X3.40
LED1-: pad.2@1663,341 VT1.3 X6.12 | length 397.1
  Top Layer w12: pad.2@1663,341 1663,342.64 1857.42,342.64 X6.12
  Bottom Layer w10: VT1.3 1663,400.31 pad.2@1663,341
LED2+: R18.1 X6.13 | length 661.5
  Top Layer w12: R18.1 2133.94,212.7 ; 2133.3,213.35 X6.13
LED2-: VT2.3 X6.14 | length 172.6
  Bottom Layer w10: X6.14@2322.1,300 VT2.3
LRD1+: R17.1 X6.11 | length 204.9
  Top Layer w12: R17.1 1790.6,292.7 X6.11
M1: X1.14 X2.53 X3.53 | length 741.9
  Top Layer w12: X1.14@240.79,1795.61 290.39,1746 450.79,1746 500.79,1696 X2.53 640,1646 775,1646 825,1696 X3.53
M2: X1.31 X2.36 X3.36 | length 742.7
  Top Layer w12: X1.31 449.61,2695.61 499.21,2646 608.89,2646 658.89,2596 775,2596 825,2646 950,2646 X3.36
M4: X1.25 X2.42 X3.42 | length 741.9
  Top Layer w12: X1.25@340.79,2395.61 451.18,2395.61 503.29,2343.5 609.67,2343.5 657.17,2296 X2.42 775,2296 825,2346 950,2346 X3.42
"M5 VREF": X1.20 X2.47 X3.47 | length 741.9
  Top Layer w12: X1.20@240.79,2095.61 290.39,2046 450.79,2046 500.79,1996 X2.47 640,1946 775,1946 825,1996 X3.47
M6: X1.19 X2.48 X3.48 | length 709.1
  Top Layer w12: X1.19@340.79,2095.61 451.18,2095.61 500.79,2046 607.17,2046 657.17,1996 ; X2.48 775,1996 825,2046 950,2046 X3.48
MDIN0: D1.27 X6.2 | length 304
  Bottom Layer w10: X6.2 1878,718.12 1878,918.21 1929.73,969.94 D1.27
MDIN1: D1.23 pad.2@1990,890 X6.6 | length 333.5
  Top Layer w12: pad.2@1990,890 1990,794.56 2073.64,710.92 X6.6
  Bottom Layer w10: pad.2@1990,890 2008.47,908.47 D1.23
MDIN2: D1.21 X6.5 | length 184.9
  Bottom Layer w10: X6.5 2047.84,823.57 D1.21
MDIN3: D1.17 X6.8 | length 303.9
  Bottom Layer w10: D1.17 2127,990.12 2127,938 2185.2,879.8 X6.8
MDIP0: D1.28 X6.1 | length 210.6
  Bottom Layer w10: X6.1 1835.2,915.69 D1.28
MDIP1: D1.24 X6.3 | length 201.7
  Bottom Layer w10: X6.3 1935.2,865.2 1989,919 D1.24@1989,990.32
MDIP2: D1.22 X6.4 | length 277.6
  Bottom Layer w10: X6.4@1985.2,730.92 1985,731.12 1985,846 2028.16,889.16 D1.22
MDIP3: D1.18 X6.7 | length 191.3
  Bottom Layer w10: D1.18 2106.9,969.59 2109,967.49 2109,837.12 X6.7
N1: X1.13 X2.54 X3.54 | length 709.1
  Top Layer w12: X1.13@340.79,1795.61 450.39,1795.61 500,1746 607.17,1746 657.17,1696 ; X2.54 775,1696 825,1746 950,1746 X3.54
N2: X1.29 X2.38 X3.38 | length 741.9
  Top Layer w12: X1.29@340.79,2595.61 450.39,2595.61 500,2546 608.89,2546 658.89,2496 775,2496 825,2546 950,2546 X3.38
N3: X1.30 X2.37 X3.37 | length 741.9
  Top Layer w12: X1.30@240.79,2595.61 290.39,2546 450.79,2546 500.79,2496 590,2496 640,2446 775,2446 825,2496 X3.37
Net1_1: 1.1 D1.12 | length 35.1
  Bottom Layer w10: D1.12 1.1@2231.58,1060.42
NetB1_1: B1.1 C2.2 D1.33 | length 588.3
  Bottom Layer w10: C2.2 1620,793.83 B1.1 1623.27,837.27 1681,895 1681,1037 1721,1077 1835.86,1077 1857.87,1099.01 1878.76,1099.01 D1.33
NetB1_3: B1.3 C1.2 D1.34 | length 679.7
  Bottom Layer w10: C1.2 B1.3@1405.39,933.56 ; B1.3 1566.83,1095 1828.41,1095 1852.1,1118.69 1878.76,1118.69 D1.34
NetC9_2: C9.2 C10.2 D1.35 pad.2@1767,1139 Z1.2 | length 296.3
  Top Layer w12: Z1.2@1582.44,1139 pad.2@1767,1139
  Bottom Layer w10: pad.2@1767,1140.09 D1.35@1878.76,1139.94
NetC11_2: C11.2 C12.1 C13.1 C14.1 D1.3 D1.19 D1.26 D1.38 pad.2@1788,1199 pad.2@1936,933 pad.2@2089,932 pad.2@2258,1238 Z2.2 | length 1511
  Top Layer w12: Z2.2 pad.2@1787.44,1198.44 ; pad.2@1788,1199 1788.5,1198.5 1788.5,957.5 1813,933 pad.2@1936,933 ; C14.1@1936,906.68 pad.2@1936,933 ; pad.2@2087,934 pad.2@1936,933 ; C13.1@2089,904.69 2089,932 2120,963 2203,963 2258,1018 2258,1238 2258,1300 2244,1314 C12.1
  Bottom Layer w10: pad.2@1788,1199 D1.38@1879.32,1198 ; pad.2@1936,933 1936,949 1949.42,962.42 D1.26 ; D1.19 2087.5,990.25 pad.2@2087.5,933.5 ; D1.3 pad.2@2257.58,1237.58
NetC27_1: 
NetC29_1: 
NetD1_13: D1.13 pad.2@2366,957 pad.2@2580,412 VT2.1 | length 906.1
  Top Layer w12: pad.2@2366,957 2580,734 pad.2@2580,412
  Bottom Layer w10: D1.13 2273.27,1040.73 pad.2@2366,957 ; VT2.1@2580,338.71 pad.2@2580,412
NetD1_14: D1.14 pad.2@1580,368.18 pad.2@2331,923 VT1.1 | length 1413.3
  Top Layer w12: pad.2@1576,368.18 2051.82,368.18 2335,651.36 2331,923 pad.2@2335,919
  Bottom Layer w10: VT1.1 1571.29,368 pad.2@1580,368.18 ; D1.14 2232.95,1021.05 pad.2@2331,923
NetD1_15: D1.15 R2.2 | length 42.3
  Bottom Layer w10: D1.15 2165.95,990.23 R2.2
NetD1_30: D1.30 pad.2@1751,1023 R3.1 | length 172.4
  Top Layer w12: R3.1 pad.2@1751,1023
  Bottom Layer w10: pad.2@1751,1023 1829,1023 1846.73,1040.73 D1.30
NetD2_1: D2.1 R5.1 | length 123.9
  Top Layer w12: R5.1 656.56,772.97 D2.1@672.24,772.97
NetD2_3: D2.3 L1.1
NetD2_7: D2.7 R6.1 R7.2 | length 189.6
  Top Layer w12: D2.7 835.48,746.8 874,785.31 ; R7.2 874,785.31 ; R6.1@908.94,785.31 874,785.31 ; R6.1@919.39,784.98 R6.1@920,784.37
NetD2_8: D2.8 R4.1 | length 321.8
  Top Layer w10: D2.8@773.8,771 D2.8
  Top Layer w12: R4.1 549.47,884 615,884 728,771 D2.8@773.8,771
NetD3_1: D3.1 R9.1 | length 101.3
  Top Layer w10: D3.1 D3.1@2577.39,2245.39
  Top Layer w12: D3.1 2621.53,2280.85 R9.1
NetD3_3: D3.3 L2.1
NetD3_7: D3.7 R10.1 R11.2 | length 209
  Top Layer w10: 2551.8,2074.2 D3.7
  Top Layer w12: 2551.8,2074.2 2588,2038 2604,2038 2604.37,2037.63 R10.1 ; 2603.47,2038.53 R11.2
NetD3_8: D3.8 R8.1 | length 303
  Top Layer w12: D3.8 2577.39,2185.39 2653,2261 2653,2361.53 R8.1
NetD4_1: D4.1 R13.1 | length 114.3
  Top Layer w12: D4.1 3405.53,796.32 R13.1
NetD4_3: D4.3 L3.1
NetD4_7: D4.7 R14.1 R15.2 | length 222.5
  Top Layer w12: D4.7 3314.8,537.2 3364.8,537.2 ; R14.1@3364.8,481.57 3364.8,537.2 ; R15.2@3364.8,562.48 3364.8,537.2
NetD4_8: D4.8 R12.1 | length 322.7
  Top Layer w12: D4.8 3340.39,677.85 3443,780.47 3443,856.07 R12.1
NetR16_1: R16.1 X6.15 X6.16 | length 697.8
  Bottom Layer w10: R16.1 1725.08,571 1755.08,601 X6.15@2364.92,601
P1: X1.12 X2.55 X3.55 | length 741.9
  Top Layer w12: X1.12@240.79,1695.61 290.39,1646 450.79,1646 500.79,1596 X2.55 640,1546 775,1546 825,1596 X3.55
P3: X1.24 X2.43 X3.43 | length 741.9
  Top Layer w12: X1.24@240.79,2295.61 290.39,2246 450.79,2246 500.79,2196 X2.43 640,2146 775,2146 825,2196 X3.43
"P5 VREF": X1.16 X2.51 X3.51 | length 741.9
  Top Layer w12: X1.16@240.79,1895.61 290.39,1846 450.79,1846 500.79,1796 X2.51 640,1746 775,1746 825,1796 X3.51
P6: X1.15 X2.52 X3.52 | length 741.9
  Top Layer w12: X1.15@340.79,1895.61 450.39,1895.61 500,1846 607.17,1846 657.17,1796 X2.52 775,1796 825,1846 950,1846 X3.52
R1: X1.11 X2.56 X3.56 | length 709.1
  Top Layer w12: X1.11@340.79,1695.61 451.18,1695.61 500.79,1646 607.17,1646 657.17,1596 ; X2.56 775,1596 825,1646 950,1646 X3.56
R2: X1.10 X2.57 X3.57 | length 741.9
  Top Layer w12: X1.10@240.79,1595.61 290.39,1546 450.79,1546 500.79,1496 X2.57 640,1446 775,1446 825,1496 X3.57
R3: X1.23 X2.44 X3.44 | length 741.9
  Top Layer w12: X1.23@340.79,2295.61 450.39,2295.61 500,2246 607.17,2246 657.17,2196 X2.44 775,2196 825,2246 950,2246 X3.44
T2: X1.9 X2.58 X3.58 | length 741.9
  Top Layer w12: X1.9@340.79,1595.61 451.18,1595.61 500.79,1546 607.17,1546 657.17,1496 X2.58 775,1496 825,1546 950,1546 X3.58
T3: X1.18 X2.49 X3.49 | length 741.9
  Top Layer w12: X1.18@240.79,1995.61 290.39,1946 450.79,1946 500.79,1896 X2.49 640,1846 775,1846 825,1896 X3.49
T4: X1.17 X2.50 X3.50 | length 709.1
  Top Layer w12: X1.17@340.79,1995.61 451.18,1995.61 500.79,1946 607.17,1946 657.17,1896 ; X2.50 775,1896 825,1946 950,1946 X3.50
U1: X1.8 X2.59 X3.59 | length 741.9
  Top Layer w12: X1.8@240.79,1495.61 290.39,1446 450.79,1446 500.79,1396 X2.59 640,1346 775,1346 825,1396 X3.59
U2: X1.7 X2.60 X3.60 | length 741.9
  Top Layer w12: X1.7@340.79,1495.61 450.39,1495.61 500,1446 607.17,1446 657.17,1396 X2.60 775,1396 825,1446 950,1446 X3.60
pads on no net: B1.2 B1.4 D1.1 D1.2 D1.4 D1.5 D1.9 D1.29 D1.31 D1.32 D1.36 D1.37 D1.39 D1.40 D1.41 X1.3 X1.4 X1.6 X6.17 X6.18

## Polygon pours and split planes (outlines as drawn)
GND on Top Layer "Top Layer-gnd" (solid, pour order 8): 0,4480 1,4479 1,0 3542,0 3543,-1 3543,4481
GND on Bottom Layer "Bottom Layer-gnd" (solid, pour order 2): 0,0 3543,0 3543,4480 0,4480

## Other copper
Top Layer:
  rectangle net +5V: 300,1146 1050,1236
  region net +1,8VD: 2436,1591 1728,1591 1697,1560 1697,1237 1659,1237 1601,1179 1564,1179 1564,1221 1659,1316 1659,1577 1708,1626 1709,1625 2436,1625
  region net +3,3VD: 752,689 754,689 822,689 897,614 897,366 953,366 953,749 896,749 850,703 752,703 752,693
  region net +1,8VD: 2495,2160 2495,2158 2495,2090 2420,2015 2172,2015 2172,1959 2555,1959 2555,2016 2509,2062 2509,2160 2499,2160
  region net NetD3_3: 2533,2214 2518,2214 2518,2274 2493,2299 2398,2299 2393,2294 2393,2114 2168,2114 2168,2194 2327.5,2339 2533,2339
  region net +1,0VD: 3256,653 3256,651 3256,583 3181,508 2933,508 2933,452 3316,452 3316,509 3270,555 3270,653 3260,653
  region net +5V: 3470,1230 3470,1150 2790,1150 2790,2445 2540.46,2445 2540,2445.46 2540,2510 2870,2510 2870,1230 3470,1230 3470,1225
  region net NetD4_3: 3297,705 3282,705 3282,765 3257,790 3162,790 3157,785 3157,605 2932,605 2932,685 3091.5,830 3297,830
  region net NetD2_3: 700,730 700,715 649,715 642,708 642,590 800,590 800,365 720,365 617,478.3 617,730